# Altium PCB Layout.PcbDoc
Units mil, origin at the board's own origin, x right, y up, seen from the top; angles counter-clockwise.
Board outline 6000 x 4000 mil, 2 copper layers (Top Layer, Bottom Layer); 1 components, 1 nets, 47 pads, 0 vias.
Unrouted connection lines stored in the file: 10.
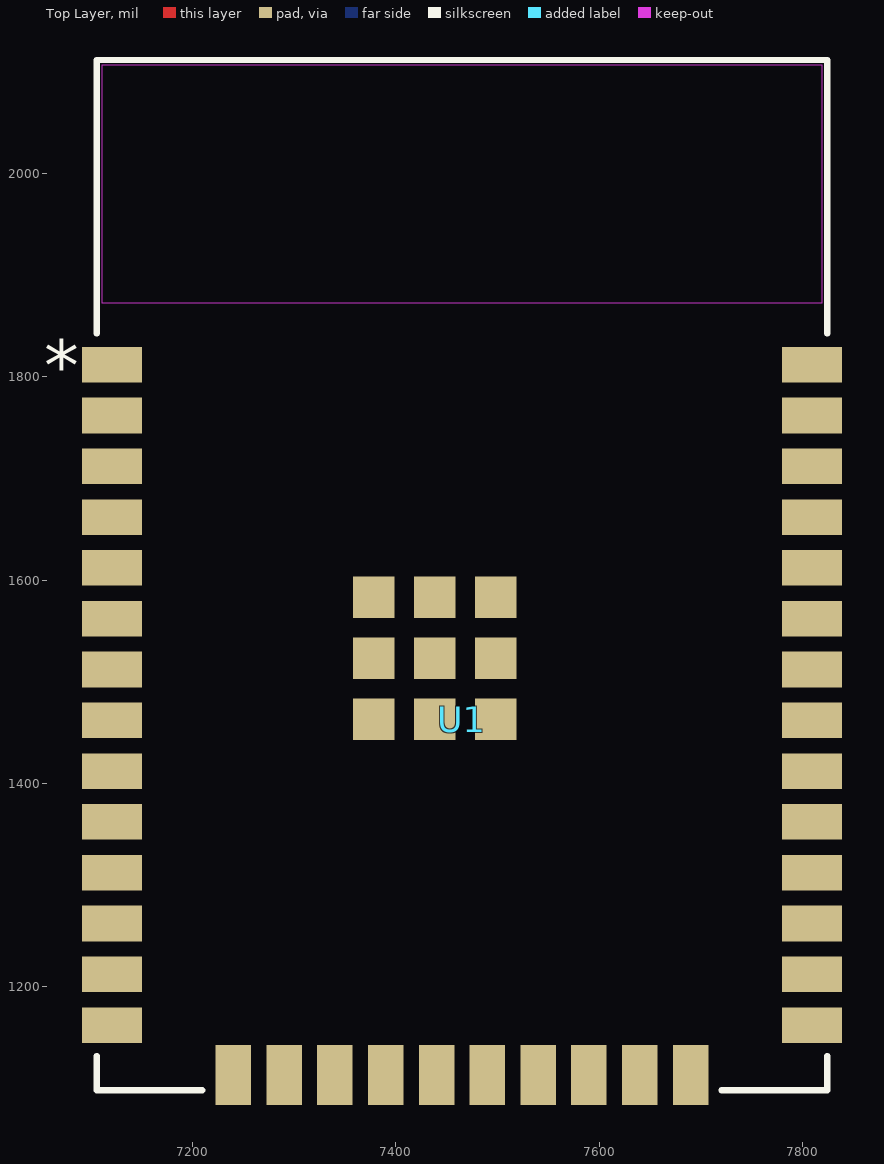
[diagram p0: Top Layer view]
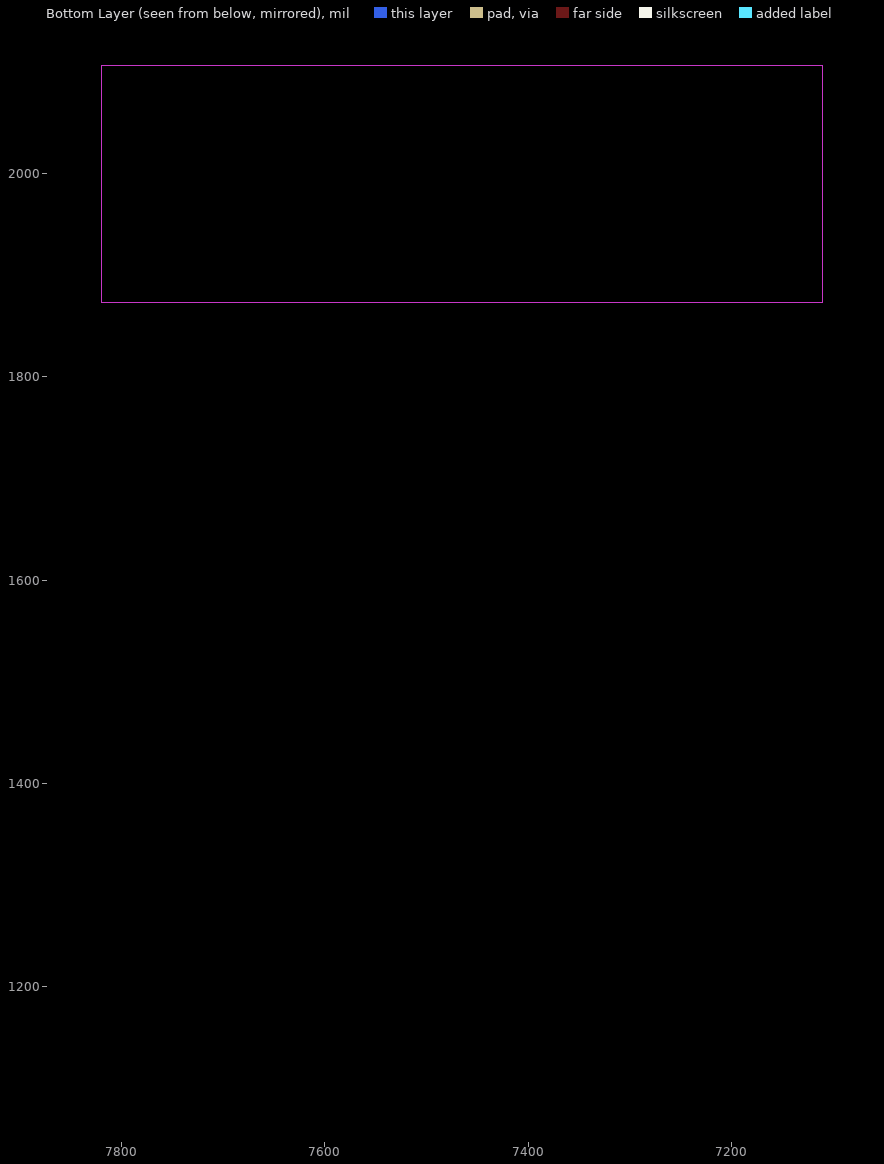
[diagram p1: Bottom Layer view, seen from below]

## Layer stack, top to bottom
Top Solder: solder mask 0.4, Solder Resist, Dk 3.5
Top Layer: signal copper 1.4
Dielectric 1: dielectric 12.6, FR-4, Dk 4.8
Bottom Layer: signal copper 1.4
Bottom Solder: solder mask 0.4, Solder Resist, Dk 3.5

## Board outline
1000,1000 7000,1000 7000,5000 1000,5000

## Design rules (kind name [scope] priority, off if disabled: settings)
Clearance [All] p1: gap=10 ignorepadtopadclearanceinfootprint=FALSE except(0: Arc-Hole Track-Hole SMDPad-Hole THPad-Hole Via-Hole Fill-Hole Poly-Hole Region-Hole Text-Hole)
PolygonConnect [All] p1: connectstyle=Relief reliefconductorwidth=10 reliefentries=4 polygonreliefangle="90 Angle" airgapwidth=10
RoomDefinition Esquematico [InComponentClass('Esquematico')] p1: confinementstyle=ConfineIn formatcopy=TRUE lockcomponents=FALSE outline 7045,1065 7860,1065 7860,2225 7045,2225
RoutingVias [All] p1: holewidth=28 width=50 viastyle="Through Hole" minholewidth=28 minwidth=50 maxholewidth=28 maxwidth=50
SolderMaskExpansion [All] p1: expansion=4 istentingtop=FALSE
Width [All] p1: maxlimit=10 minlimit=10 preferedwidth=10
30 further rules are at their usual default settings.

## Components (designator, comment, footprint, x,y, rotation, side; value= is the part's Value field where it differs from the comment)
U1 "ESP32-WROOM-32-N4" MOD_ESP32-WROOM-32_EXP 7465,1605 r0 top

## Footprints (in the part's own frame and the unit in brackets; to place one, negate y for a bottom-side part, rotate by r counter-clockwise, add the part's x,y. Pads: shape width x height; smd on the part's side, far side on the other; paste and mask are expansions set on the pad)
MOD_ESP32-WROOM-32_EXP [mil]
  rect 59x35 smd paste+0 mask+0: 1(-344.49,207.09) 2(-344.49,157.09) 3(-344.49,107.09) 4(-344.49,57.09) 5(-344.49,7.09) 6(-344.49,-42.91) 7(-344.49,-92.91) 8(-344.49,-142.91) 9(-344.49,-192.91) 10(-344.49,-242.91) 11(-344.49,-292.91) 12(-344.49,-342.91) 13(-344.49,-392.91) 14(-344.49,-442.91) 25(344.49,-442.91) 26(344.49,-392.91) 27(344.49,-342.91) 28(344.49,-292.91) 29(344.49,-242.91) 30(344.49,-192.91) 31(344.49,-142.91) 32(344.49,-92.91) 33(344.49,-42.91) 34(344.49,7.09) 35(344.49,57.09) 36(344.49,107.09) 37(344.49,157.09) 38(344.49,207.09)
  rect 35x59 smd paste+0 mask+0: 15(-225,-492.13) 16(-175,-492.13) 17(-125,-492.13) 18(-75,-492.13) 19(-25,-492.13) 20(25,-492.13) 21(75,-492.13) 22(125,-492.13) 23(175,-492.13) 24(225,-492.13)
  rect 41x41 smd paste+0 mask+0: 39(-26.77,-81.89) 40(-86.81,-21.85) 41(-86.81,-81.89) 42(-86.81,-141.93) 43(-26.77,-141.93) 44(33.27,-141.93) 45(33.27,-81.89) 46(33.27,-21.85) 47(-26.77,-21.85)
  Keep-Out Layer region: 354.5,502 -354.5,502 -354.5,268 354.5,268
  silkscreen extent -360,-507 360,507, body extent -356,-502 354,503, height 124

## Part data
U1: "No Description Available", Mfr_Name="Espressif Systems", Supplier Part Number 1=1965-ESP32-WROOM-32-N4DKR-ND, RefDes=RefDes, Supplier 1=Digikey, Type=RF

## Nets (pads, with @x,y where several pads share a name; then routed paths per layer and width w, separated by ;. In a path a pad name is that pad's centre, name@x,y a point inside that pad or via, vN(x,y) a via of type N, cw(c..) or ccw(c..) an arc to the next point about the centre after c; other vN are vias at no path point)
GND: U1.1 U1.38 U1.39 U1.40 U1.41 U1.42 U1.43 U1.44 U1.45 U1.46 U1.47
pads on no net: U1.2 U1.3 U1.4 U1.5 U1.6 U1.7 U1.8 U1.9 U1.10 U1.11 U1.12 U1.13 U1.14 U1.15 U1.16 U1.17 U1.18 U1.19 U1.20 U1.21 U1.22 U1.23 U1.24 U1.25 U1.26 U1.27 U1.28 U1.29 U1.30 U1.31 U1.32 U1.33 U1.34 U1.35 U1.36 U1.37

## Text inside footprints (layer, text, board x,y; h text height)
U1: Top Overlay "*" at 7053.51,1787.09 h50; Mechanical 13 "*" at 7162.51,1787.09 h50